# Altium PCB WorldClock.PcbDoc (part 4 of 13)
Units mil, origin at the board's own origin, x right, y up, seen from the top; angles counter-clockwise.
Board outline 3700 x 3850 mil, 2 copper layers (Top Layer, Bottom Layer); 227 components, 134 nets, 1324 pads, 248 vias.
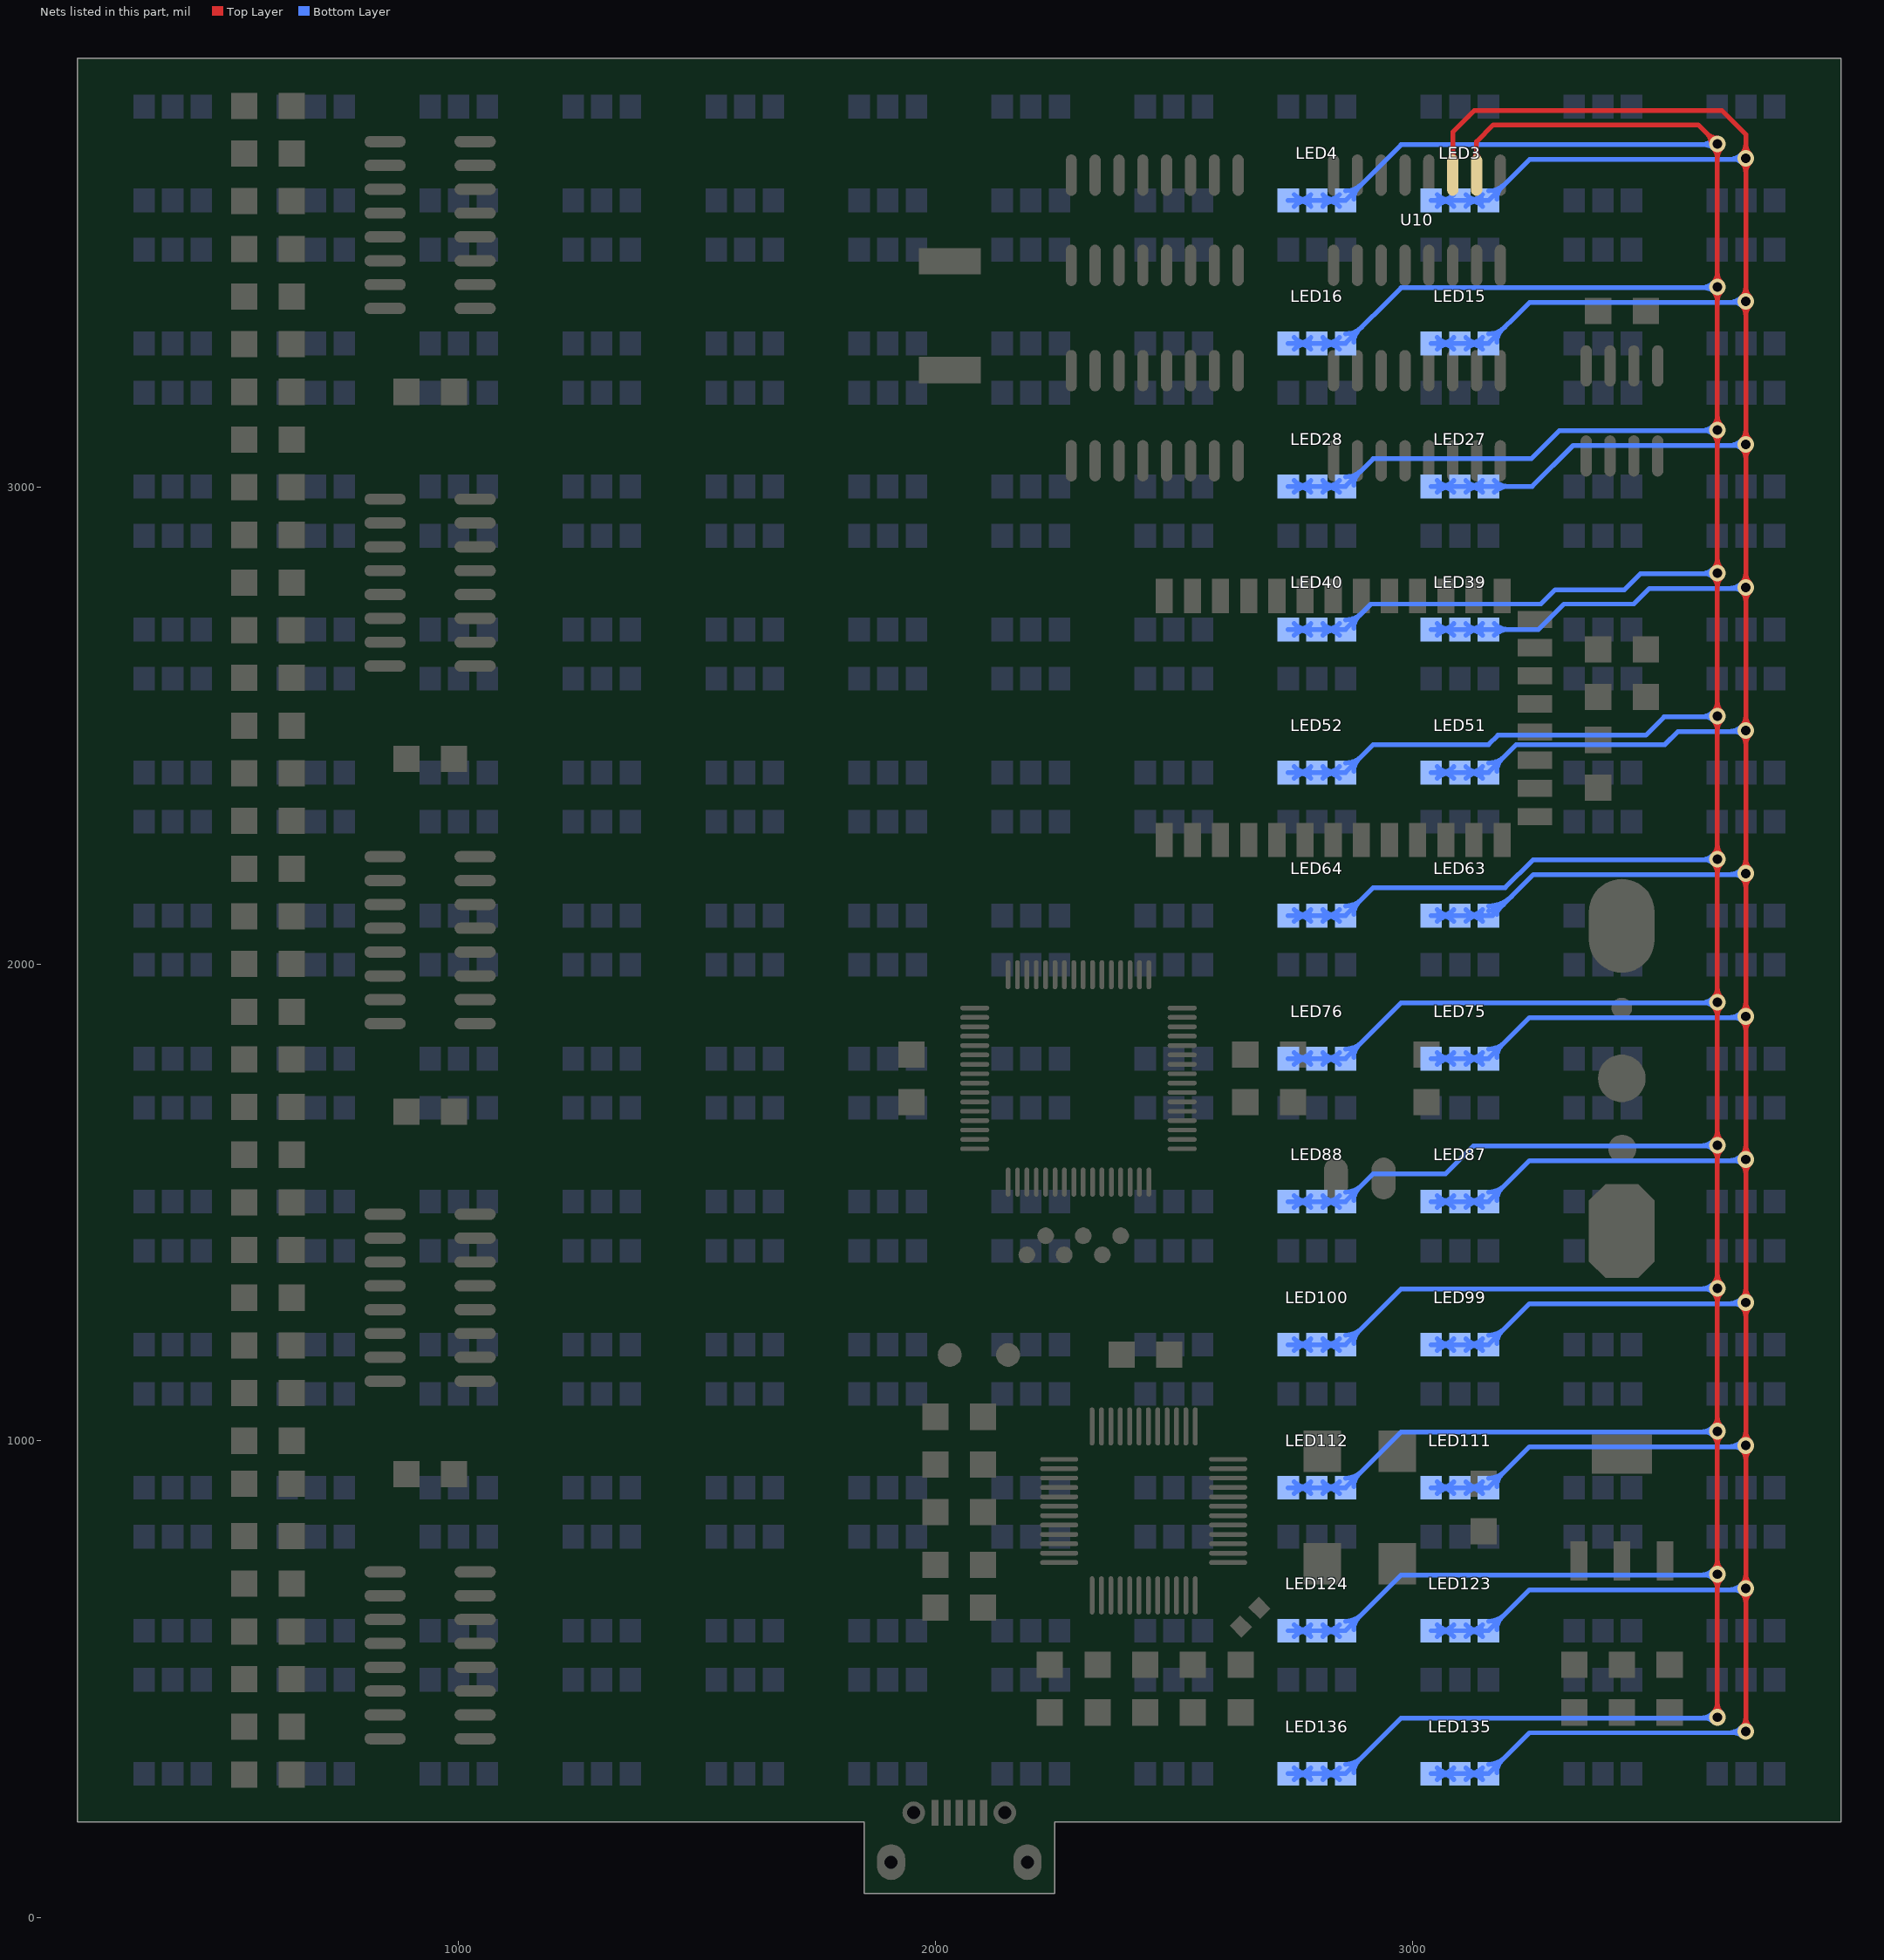
[diagram p4: the nets of this part, all layers, seen from the top]

## Via types
v1: diameter 35, hole 20, Top Layer to Bottom Layer, tented both sides, 213 vias
v2: diameter 24, hole 12, Top Layer to Bottom Layer, tented both sides, 35 vias

## Nets (pads, with @x,y where several pads share a name; then routed paths per layer and width w, separated by ;. In a path a pad name is that pad's centre, name@x,y a point inside that pad or via, vN(x,y) a via of type N, cw(c..) or ccw(c..) an arc to the next point about the centre after c; other vN are vias at no path point) (continued)
CH3: LED3.4 LED3.5 LED3.6 LED15.4 LED15.5 LED15.6 LED27.4 LED27.5 LED27.6 LED39.4 LED39.5 LED39.6 LED51.4 LED51.5 LED51.6 LED63.4 LED63.5 LED63.6 LED75.4 LED75.5 LED75.6 LED87.4 LED87.5 LED87.6 LED99.4 LED99.5 LED99.6 LED111.4 LED111.5 LED111.6 LED123.4 LED123.5 LED123.6 LED135.4 LED135.5 LED135.6 U10.11 | length 19480.7
  Top Layer w10: U10.11@3080.18,3690.8 ccw(c3068.56,3702.43) 3085,3702.43 ccw(c3101.44,3702.43) U10.11@3089.82,3690.8 ; U10.11@3085,3654.49 3085,3745 3130,3790 3650,3790 3700,3740 v1(3700,3690) v1(3700,3390) v1(3700,3090) v1(3700,2790) v1(3700,2490) v1(3700,2190) v1(3700,1890) v1(3700,1590) v1(3700,1290) v1(3700,990) v1(3700,690) v1(3700,390) ; v1@3691.16,398.84 ccw(c3669.82,420.18) 3700,420.18 ccw(c3730.18,420.18) v1@3708.84,398.84 ; v1@3691.16,681.16 cw(c3669.82,659.82) 3700,659.82 cw(c3730.18,659.82) v1@3708.84,681.16 ; v1@3691.16,698.84 ccw(c3669.82,720.18) 3700,720.18 ccw(c3730.18,720.18) v1@3708.84,698.84 ; v1@3691.16,981.16 cw(c3669.82,959.82) 3700,959.82 cw(c3730.18,959.82) v1@3708.84,981.16 ; v1@3691.16,998.84 ccw(c3669.82,1020.18) 3700,1020.18 ccw(c3730.18,1020.18) v1@3708.84,998.84 ; v1@3691.16,1281.16 cw(c3669.82,1259.82) 3700,1259.82 cw(c3730.18,1259.82) v1@3708.84,1281.16 ; v1@3691.16,1298.84 ccw(c3669.82,1320.18) 3700,1320.18 ccw(c3730.18,1320.18) v1@3708.84,1298.84 ; v1@3691.16,1581.16 cw(c3669.82,1559.82) 3700,1559.82 cw(c3730.18,1559.82) v1@3708.84,1581.16 ; v1@3691.16,1598.84 ccw(c3669.82,1620.18) 3700,1620.18 ccw(c3730.18,1620.18) v1@3708.84,1598.84 ; v1@3691.16,1881.16 cw(c3669.82,1859.82) 3700,1859.82 cw(c3730.18,1859.82) v1@3708.84,1881.16 ; v1@3691.16,1898.84 ccw(c3669.82,1920.18) 3700,1920.18 ccw(c3730.18,1920.18) v1@3708.84,1898.84 ; v1@3691.16,2181.16 cw(c3669.82,2159.82) 3700,2159.82 cw(c3730.18,2159.82) v1@3708.84,2181.16 ; v1@3691.16,2198.84 ccw(c3669.82,2220.18) 3700,2220.18 ccw(c3730.18,2220.18) v1@3708.84,2198.84 ; v1@3691.16,2481.16 cw(c3669.82,2459.82) 3700,2459.82 cw(c3730.18,2459.82) v1@3708.84,2481.16 ; v1@3691.16,2498.84 ccw(c3669.82,2520.18) 3700,2520.18 ccw(c3730.18,2520.18) v1@3708.84,2498.84 ; v1@3691.16,2781.16 cw(c3669.82,2759.82) 3700,2759.82 cw(c3730.18,2759.82) v1@3708.84,2781.16 ; v1@3691.16,2798.84 ccw(c3669.82,2820.18) 3700,2820.18 ccw(c3730.18,2820.18) v1@3708.84,2798.84 ; v1@3691.16,3081.16 cw(c3669.82,3059.82) 3700,3059.82 cw(c3730.18,3059.82) v1@3708.84,3081.16 ; v1@3691.16,3098.84 ccw(c3669.82,3120.18) 3700,3120.18 ccw(c3730.18,3120.18) v1@3708.84,3098.84 ; v1@3691.16,3381.16 cw(c3669.82,3359.82) 3700,3359.82 cw(c3730.18,3359.82) v1@3708.84,3381.16 ; v1@3691.16,3398.84 ccw(c3669.82,3420.18) 3700,3420.18 ccw(c3730.18,3420.18) v1@3708.84,3398.84 ; v1@3691.16,3681.16 cw(c3669.82,3659.82) 3700,3659.82 cw(c3730.18,3659.82) v1@3708.84,3681.16 ; v1@3691.16,3698.84 ccw(c3669.82,3720.18) 3700,3720.18 ccw(c3730.18,3720.18) v1@3708.84,3698.84
  Bottom Layer w10: LED135.6@3040,301.57 LED135.5@3100,301.57 LED135.4@3160,301.57 3245.93,387.5 3697.5,387.5 v1(3700,390) ; LED123.6@3040,601.57 LED123.5@3100,601.57 LED123.4@3160,601.57 3245.93,687.5 3697.5,687.5 v1(3700,690) ; LED111.6@3040,901.57 LED111.5@3100,901.57 LED111.4@3160,901.57 3245.93,987.5 3697.5,987.5 v1(3700,990) ; LED99.6@3040,1201.57 LED99.5@3100,1201.57 LED99.4@3160,1201.57 3245.93,1287.5 3697.5,1287.5 v1(3700,1290) ; LED87.6@3040,1501.57 LED87.5@3100,1501.57 LED87.4@3160,1501.57 3245.93,1587.5 3697.5,1587.5 v1(3700,1590) ; LED75.6@3040,1801.57 LED75.5@3100,1801.57 LED75.4@3160,1801.57 3245.93,1887.5 3697.5,1887.5 v1(3700,1890) ; LED63.6@3040,2101.57 LED63.5@3100,2101.57 LED63.4@3160,2101.57 3168.44,2101.57 3254.37,2187.5 3697.5,2187.5 v1(3700,2190) ; LED51.6@3040,2401.57 LED51.5@3100,2401.57 LED51.4@3160,2401.57 3218.43,2460 3530,2460 3557.5,2487.5 3697.5,2487.5 v1(3700,2490) ; LED39.6@3040,2701.57 LED39.5@3100,2701.57 LED39.4@3160,2701.57 3265,2701.57 3318.43,2755 3465,2755 3497.5,2787.5 3697.5,2787.5 v1(3700,2790) ; LED27.6@3040,3001.57 LED27.5@3100,3001.57 LED27.4@3160,3001.57 3251.57,3001.57 3337.5,3087.5 3697.5,3087.5 v1(3700,3090) ; LED15.6@3040,3301.57 LED15.5@3100,3301.57 LED15.4@3160,3301.57 3245.93,3387.5 3697.5,3387.5 v1(3700,3390) ; LED3.6@3040,3601.57 LED3.5@3100,3601.57 LED3.4@3160,3601.57 3245.93,3687.5 3697.5,3687.5 v1(3700,3690) ; LED135.6@3052.37,289.2 cw(c3082.25,259.33) 3082.25,301.57 cw(c3082.25,343.82) LED135.6@3052.37,313.95 ; LED123.6@3052.37,589.2 cw(c3082.25,559.33) 3082.25,601.57 cw(c3082.25,643.82) LED123.6@3052.37,613.95 ; LED111.6@3052.37,889.2 cw(c3082.25,859.33) 3082.25,901.57 cw(c3082.25,943.82) LED111.6@3052.37,913.95 ; LED99.6@3052.37,1189.2 cw(c3082.25,1159.33) 3082.25,1201.57 cw(c3082.25,1243.82) LED99.6@3052.37,1213.95 ; LED87.6@3052.37,1489.2 cw(c3082.25,1459.33) 3082.25,1501.57 cw(c3082.25,1543.82) LED87.6@3052.37,1513.95 ; LED75.6@3052.37,1789.2 cw(c3082.25,1759.33) 3082.25,1801.57 cw(c3082.25,1843.82) LED75.6@3052.37,1813.95 ; LED63.6@3052.37,2089.2 cw(c3082.25,2059.33) 3082.25,2101.57 cw(c3082.25,2143.82) LED63.6@3052.37,2113.95 ; LED51.6@3052.37,2389.2 cw(c3082.25,2359.33) 3082.25,2401.57 cw(c3082.25,2443.82) LED51.6@3052.37,2413.95 ; LED39.6@3052.37,2689.2 cw(c3082.25,2659.33) 3082.25,2701.57 cw(c3082.25,2743.82) LED39.6@3052.37,2713.95 ; LED27.6@3052.37,2989.2 cw(c3082.25,2959.33) 3082.25,3001.57 cw(c3082.25,3043.82) LED27.6@3052.37,3013.95 ; LED15.6@3052.37,3289.2 cw(c3082.25,3259.33) 3082.25,3301.57 cw(c3082.25,3343.82) LED15.6@3052.37,3313.95 ; LED3.6@3052.37,3589.2 cw(c3082.25,3559.33) 3082.25,3601.57 cw(c3082.25,3643.82) LED3.6@3052.37,3613.95 ; LED135.6@3055.16,295.32 cw(c3071.02,286.17) 3066.28,303.86 ; LED135.6@3055.16,307.82 ccw(c3071.02,316.98) 3066.28,299.29 ; LED123.6@3055.16,595.32 cw(c3071.02,586.17) 3066.28,603.86 ; LED123.6@3055.16,607.82 ccw(c3071.02,616.98) 3066.28,599.29 ; LED111.6@3055.16,895.32 cw(c3071.02,886.17) 3066.28,903.86 ; LED111.6@3055.16,907.82 ccw(c3071.02,916.98) 3066.28,899.29 ; LED99.6@3055.16,1195.32 cw(c3071.02,1186.17) 3066.28,1203.86 ; LED99.6@3055.16,1207.82 ccw(c3071.02,1216.98) 3066.28,1199.29 ; LED87.6@3055.16,1495.32 cw(c3071.02,1486.17) 3066.28,1503.86 ; LED87.6@3055.16,1507.82 ccw(c3071.02,1516.98) 3066.28,1499.29 ; LED75.6@3055.16,1795.32 cw(c3071.02,1786.17) 3066.28,1803.86 ; LED75.6@3055.16,1807.82 ccw(c3071.02,1816.98) 3066.28,1799.29 ; LED63.6@3055.16,2095.32 cw(c3071.02,2086.17) 3066.28,2103.86 ; LED63.6@3055.16,2107.82 ccw(c3071.02,2116.98) 3066.28,2099.29 ; LED51.6@3055.16,2395.32 cw(c3071.02,2386.17) 3066.28,2403.86 ; LED51.6@3055.16,2407.82 ccw(c3071.02,2416.98) 3066.28,2399.29 ; LED39.6@3055.16,2695.32 cw(c3071.02,2686.17) 3066.28,2703.86 ; LED39.6@3055.16,2707.82 ccw(c3071.02,2716.98) 3066.28,2699.29 ; LED27.6@3055.16,2995.32 cw(c3071.02,2986.17) 3066.28,3003.86 ; LED27.6@3055.16,3007.82 ccw(c3071.02,3016.98) 3066.28,2999.29 ; LED15.6@3055.16,3295.32 cw(c3071.02,3286.17) 3066.28,3303.86 ; LED15.6@3055.16,3307.82 ccw(c3071.02,3316.98) 3066.28,3299.29 ; LED3.6@3055.16,3595.32 cw(c3071.02,3586.17) 3066.28,3603.86 ; LED3.6@3055.16,3607.82 ccw(c3071.02,3616.98) 3066.28,3599.29 ; LED135.6@3056.56,293.41 cw(c3064.87,290.57) 3067.15,299.06 ; LED135.6@3056.56,309.74 ccw(c3064.87,312.58) 3067.15,304.09 ; LED123.6@3056.56,593.41 cw(c3064.87,590.57) 3067.15,599.06 ; LED123.6@3056.56,609.74 ccw(c3064.87,612.58) 3067.15,604.09 ; LED111.6@3056.56,893.41 cw(c3064.87,890.57) 3067.15,899.06 ; LED111.6@3056.56,909.74 ccw(c3064.87,912.58) 3067.15,904.09 ; LED99.6@3056.56,1193.41 cw(c3064.87,1190.57) 3067.15,1199.06 ; LED99.6@3056.56,1209.74 ccw(c3064.87,1212.58) 3067.15,1204.09 ; LED87.6@3056.56,1493.41 cw(c3064.87,1490.57) 3067.15,1499.06 ; LED87.6@3056.56,1509.74 ccw(c3064.87,1512.58) 3067.15,1504.09 ; LED75.6@3056.56,1793.41 cw(c3064.87,1790.57) 3067.15,1799.06 ; LED75.6@3056.56,1809.74 ccw(c3064.87,1812.58) 3067.15,1804.09 ; LED63.6@3056.56,2093.41 cw(c3064.87,2090.57) 3067.15,2099.06 ; LED63.6@3056.56,2109.74 ccw(c3064.87,2112.58) 3067.15,2104.09 ; LED51.6@3056.56,2393.41 cw(c3064.87,2390.57) 3067.15,2399.06 ; LED51.6@3056.56,2409.74 ccw(c3064.87,2412.58) 3067.15,2404.09 ; LED39.6@3056.56,2693.41 cw(c3064.87,2690.57) 3067.15,2699.06 ; LED39.6@3056.56,2709.74 ccw(c3064.87,2712.58) 3067.15,2704.09 ; LED27.6@3056.56,2993.41 cw(c3064.87,2990.57) 3067.15,2999.06 ; LED27.6@3056.56,3009.74 ccw(c3064.87,3012.58) 3067.15,3004.09 ; LED15.6@3056.56,3293.41 cw(c3064.87,3290.57) 3067.15,3299.06 ; LED15.6@3056.56,3309.74 ccw(c3064.87,3312.58) 3067.15,3304.09 ; LED3.6@3056.56,3593.41 cw(c3064.87,3590.57) 3067.15,3599.06 ; LED3.6@3056.56,3609.74 ccw(c3064.87,3612.58) 3067.15,3604.09 ; LED135.5@3087.63,289.2 ccw(c3057.75,259.33) 3057.75,301.57 ccw(c3057.75,343.82) LED135.5@3087.63,313.95 ; LED123.5@3087.63,589.2 ccw(c3057.75,559.33) 3057.75,601.57 ccw(c3057.75,643.82) LED123.5@3087.63,613.95 ; LED111.5@3087.63,889.2 ccw(c3057.75,859.33) 3057.75,901.57 ccw(c3057.75,943.82) LED111.5@3087.63,913.95 ; LED99.5@3087.63,1189.2 ccw(c3057.75,1159.33) 3057.75,1201.57 ccw(c3057.75,1243.82) LED99.5@3087.63,1213.95 ; LED87.5@3087.63,1489.2 ccw(c3057.75,1459.33) 3057.75,1501.57 ccw(c3057.75,1543.82) LED87.5@3087.63,1513.95 ; LED75.5@3087.63,1789.2 ccw(c3057.75,1759.33) 3057.75,1801.57 ccw(c3057.75,1843.82) LED75.5@3087.63,1813.95 ; LED63.5@3087.63,2089.2 ccw(c3057.75,2059.33) 3057.75,2101.57 ccw(c3057.75,2143.82) LED63.5@3087.63,2113.95 ; LED51.5@3087.63,2389.2 ccw(c3057.75,2359.33) 3057.75,2401.57 ccw(c3057.75,2443.82) LED51.5@3087.63,2413.95 ; LED39.5@3087.63,2689.2 ccw(c3057.75,2659.33) 3057.75,2701.57 ccw(c3057.75,2743.82) LED39.5@3087.63,2713.95 ; LED27.5@3087.63,2989.2 ccw(c3057.75,2959.33) 3057.75,3001.57 ccw(c3057.75,3043.82) LED27.5@3087.63,3013.95 ; LED15.5@3087.63,3289.2 ccw(c3057.75,3259.33) 3057.75,3301.57 ccw(c3057.75,3343.82) LED15.5@3087.63,3313.95 ; LED3.5@3087.63,3589.2 ccw(c3057.75,3559.33) 3057.75,3601.57 ccw(c3057.75,3643.82) LED3.5@3087.63,3613.95 ; LED135.5@3112.37,289.2 cw(c3142.25,259.33) 3142.25,301.57 cw(c3142.25,343.82) LED135.5@3112.37,313.95 ; LED123.5@3112.37,589.2 cw(c3142.25,559.33) 3142.25,601.57 cw(c3142.25,643.82) LED123.5@3112.37,613.95 ; LED111.5@3112.37,889.2 cw(c3142.25,859.33) 3142.25,901.57 cw(c3142.25,943.82) LED111.5@3112.37,913.95 ; LED99.5@3112.37,1189.2 cw(c3142.25,1159.33) 3142.25,1201.57 cw(c3142.25,1243.82) LED99.5@3112.37,1213.95 ; LED87.5@3112.37,1489.2 cw(c3142.25,1459.33) 3142.25,1501.57 cw(c3142.25,1543.82) LED87.5@3112.37,1513.95 ; LED75.5@3112.37,1789.2 cw(c3142.25,1759.33) 3142.25,1801.57 cw(c3142.25,1843.82) LED75.5@3112.37,1813.95 ; LED63.5@3112.37,2089.2 cw(c3142.25,2059.33) 3142.25,2101.57 cw(c3142.25,2143.82) LED63.5@3112.37,2113.95 ; LED51.5@3112.37,2389.2 cw(c3142.25,2359.33) 3142.25,2401.57 cw(c3142.25,2443.82) LED51.5@3112.37,2413.95 ; LED39.5@3112.37,2689.2 cw(c3142.25,2659.33) 3142.25,2701.57 cw(c3142.25,2743.82) LED39.5@3112.37,2713.95 ; LED27.5@3112.37,2989.2 cw(c3142.25,2959.33) 3142.25,3001.57 cw(c3142.25,3043.82) LED27.5@3112.37,3013.95 ; LED15.5@3112.37,3289.2 cw(c3142.25,3259.33) 3142.25,3301.57 cw(c3142.25,3343.82) LED15.5@3112.37,3313.95 ; LED3.5@3112.37,3589.2 cw(c3142.25,3559.33) 3142.25,3601.57 cw(c3142.25,3643.82) LED3.5@3112.37,3613.95 ; 3132.85,299.06 cw(c3135.13,290.57) LED135.4@3143.44,293.41 ; 3132.85,304.09 ccw(c3135.13,312.58) LED135.4@3143.44,309.74 ; 3132.85,599.06 cw(c3135.13,590.57) LED123.4@3143.44,593.41 ; 3132.85,604.09 ccw(c3135.13,612.58) LED123.4@3143.44,609.74 ; 3132.85,899.06 cw(c3135.13,890.57) LED111.4@3143.44,893.41 ; 3132.85,904.09 ccw(c3135.13,912.58) LED111.4@3143.44,909.74 ; 3132.85,1199.06 cw(c3135.13,1190.57) LED99.4@3143.44,1193.41 ; 3132.85,1204.09 ccw(c3135.13,1212.58) LED99.4@3143.44,1209.74 ; 3132.85,1499.06 cw(c3135.13,1490.57) LED87.4@3143.44,1493.41 ; 3132.85,1504.09 ccw(c3135.13,1512.58) LED87.4@3143.44,1509.74 ; 3132.85,1799.06 cw(c3135.13,1790.57) LED75.4@3143.44,1793.41 ; 3132.85,1804.09 ccw(c3135.13,1812.58) LED75.4@3143.44,1809.74 ; 3132.85,2099.06 cw(c3135.13,2090.57) LED63.4@3143.44,2093.41 ; 3132.85,2104.09 ccw(c3135.13,2112.58) LED63.4@3143.44,2109.74 ; 3132.85,2399.06 cw(c3135.13,2390.57) LED51.4@3143.44,2393.41 ; 3132.85,2404.09 ccw(c3135.13,2412.58) LED51.4@3143.44,2409.74 ; 3132.85,2699.06 cw(c3135.13,2690.57) LED39.4@3143.44,2693.41 ; 3132.85,2704.09 ccw(c3135.13,2712.58) LED39.4@3143.44,2709.74 ; 3132.85,2999.06 cw(c3135.13,2990.57) LED27.4@3143.44,2993.41 ; 3132.85,3004.09 ccw(c3135.13,3012.58) LED27.4@3143.44,3009.74 ; 3132.85,3299.06 cw(c3135.13,3290.57) LED15.4@3143.44,3293.41 ; 3132.85,3304.09 ccw(c3135.13,3312.58) LED15.4@3143.44,3309.74 ; 3132.85,3599.06 cw(c3135.13,3590.57) LED3.4@3143.44,3593.41 ; 3132.85,3604.09 ccw(c3135.13,3612.58) LED3.4@3143.44,3609.74 ; 3133.72,299.29 ccw(c3128.98,316.98) LED135.4@3144.84,307.82 ; 3133.72,303.86 cw(c3128.98,286.17) LED135.4@3144.84,295.32 ; 3133.72,599.29 ccw(c3128.98,616.98) LED123.4@3144.84,607.82 ; 3133.72,603.86 cw(c3128.98,586.17) LED123.4@3144.84,595.32 ; 3133.72,899.29 ccw(c3128.98,916.98) LED111.4@3144.84,907.82 ; 3133.72,903.86 cw(c3128.98,886.17) LED111.4@3144.84,895.32 ; 3133.72,1199.29 ccw(c3128.98,1216.98) LED99.4@3144.84,1207.82 ; 3133.72,1203.86 cw(c3128.98,1186.17) LED99.4@3144.84,1195.32 ; 3133.72,1499.29 ccw(c3128.98,1516.98) LED87.4@3144.84,1507.82 ; 3133.72,1503.86 cw(c3128.98,1486.17) LED87.4@3144.84,1495.32 ; 3133.72,1799.29 ccw(c3128.98,1816.98) LED75.4@3144.84,1807.82 ; 3133.72,1803.86 cw(c3128.98,1786.17) LED75.4@3144.84,1795.32 ; 3133.72,2099.29 ccw(c3128.98,2116.98) LED63.4@3144.84,2107.82 ; 3133.72,2103.86 cw(c3128.98,2086.17) LED63.4@3144.84,2095.32 ; 3133.72,2399.29 ccw(c3128.98,2416.98) LED51.4@3144.84,2407.82 ; 3133.72,2403.86 cw(c3128.98,2386.17) LED51.4@3144.84,2395.32 ; 3133.72,2699.29 ccw(c3128.98,2716.98) LED39.4@3144.84,2707.82 ; 3133.72,2703.86 cw(c3128.98,2686.17) LED39.4@3144.84,2695.32 ; 3133.72,2999.29 ccw(c3128.98,3016.98) LED27.4@3144.84,3007.82 ; 3133.72,3003.86 cw(c3128.98,2986.17) LED27.4@3144.84,2995.32 ; 3133.72,3299.29 ccw(c3128.98,3316.98) LED15.4@3144.84,3307.82 ; 3133.72,3303.86 cw(c3128.98,3286.17) LED15.4@3144.84,3295.32 ; 3133.72,3599.29 ccw(c3128.98,3616.98) LED3.4@3144.84,3607.82 ; 3133.72,3603.86 cw(c3128.98,3586.17) LED3.4@3144.84,3595.32 ; LED135.4@3147.63,289.2 ccw(c3117.75,259.33) 3117.75,301.57 ccw(c3117.75,343.82) LED135.4@3147.63,313.95 ; LED123.4@3147.63,589.2 ccw(c3117.75,559.33) 3117.75,601.57 ccw(c3117.75,643.82) LED123.4@3147.63,613.95 ; LED111.4@3147.63,889.2 ccw(c3117.75,859.33) 3117.75,901.57 ccw(c3117.75,943.82) LED111.4@3147.63,913.95 ; LED99.4@3147.63,1189.2 ccw(c3117.75,1159.33) 3117.75,1201.57 ccw(c3117.75,1243.82) LED99.4@3147.63,1213.95 ; LED87.4@3147.63,1489.2 ccw(c3117.75,1459.33) 3117.75,1501.57 ccw(c3117.75,1543.82) LED87.4@3147.63,1513.95 ; LED75.4@3147.63,1789.2 ccw(c3117.75,1759.33) 3117.75,1801.57 ccw(c3117.75,1843.82) LED75.4@3147.63,1813.95 ; LED63.4@3147.63,2089.2 ccw(c3117.75,2059.33) 3117.75,2101.57 ccw(c3117.75,2143.82) LED63.4@3147.63,2113.95 ; LED51.4@3147.63,2389.2 ccw(c3117.75,2359.33) 3117.75,2401.57 ccw(c3117.75,2443.82) LED51.4@3147.63,2413.95 ; LED39.4@3147.63,2689.2 ccw(c3117.75,2659.33) 3117.75,2701.57 ccw(c3117.75,2743.82) LED39.4@3147.63,2713.95 ; LED27.4@3147.63,2989.2 ccw(c3117.75,2959.33) 3117.75,3001.57 ccw(c3117.75,3043.82) LED27.4@3147.63,3013.95 ; LED15.4@3147.63,3289.2 ccw(c3117.75,3259.33) 3117.75,3301.57 ccw(c3117.75,3343.82) LED15.4@3147.63,3313.95 ; LED3.4@3147.63,3589.2 ccw(c3117.75,3559.33) 3117.75,3601.57 ccw(c3117.75,3643.82) LED3.4@3147.63,3613.95 ; LED135.4@3160,321.57 ccw(c3160,369.86) 3194.14,335.72 ; LED123.4@3160,621.57 ccw(c3160,669.86) 3194.14,635.72 ; LED111.4@3160,921.57 ccw(c3160,969.86) 3194.14,935.72 ; LED99.4@3160,1221.57 ccw(c3160,1269.86) 3194.14,1235.72 ; LED87.4@3160,1521.57 ccw(c3160,1569.86) 3194.14,1535.72 ; LED75.4@3160,1821.57 ccw(c3160,1869.86) 3194.14,1835.72 ; LED63.4@3160,2111.57 ccw(c3160,2156.1) 3191.48,2124.61 ; LED63.4@3160,2121.57 ccw(c3160,2190.24) 3208.55,2141.69 ; LED51.4@3160,2421.57 ccw(c3160,2469.86) 3194.14,2435.72 ; LED15.4@3160,3321.57 ccw(c3160,3369.86) 3194.14,3335.72 ; LED3.4@3160,3621.57 ccw(c3160,3669.86) 3194.14,3635.72 ; LED39.4@3172.37,2689.2 cw(c3202.25,2659.33) 3202.25,2701.57 cw(c3202.25,2743.82) LED39.4@3172.37,2713.95 ; LED27.4@3172.37,2989.2 cw(c3202.25,2959.33) 3202.25,3001.57 cw(c3202.25,3043.82) LED27.4@3172.37,3013.95 ; LED135.4@3177.5,304.07 cw(c3213.71,304.07) 3188.11,329.68 ; LED123.4@3177.5,604.07 cw(c3213.71,604.07) 3188.11,629.68 ; LED111.4@3177.5,904.07 cw(c3213.71,904.07) 3188.11,929.68 ; LED99.4@3177.5,1204.07 cw(c3213.71,1204.07) 3188.11,1229.68 ; LED87.4@3177.5,1504.07 cw(c3213.71,1504.07) 3188.11,1529.68 ; LED75.4@3177.5,1804.07 cw(c3213.71,1804.07) 3188.11,1829.68 ; LED63.4@3177.5,2104.07 cw(c3193.33,2104.07) LED63.4@3182.14,2115.27 ; LED51.4@3177.5,2404.07 cw(c3213.71,2404.07) 3188.11,2429.68 ; LED15.4@3177.5,3304.07 cw(c3213.71,3304.07) 3188.11,3329.68 ; LED3.4@3177.5,3604.07 cw(c3213.71,3604.07) 3188.11,3629.68 ; 3663.79,387.5 ccw(c3663.79,426.21) v1@3691.16,398.84 ; 3663.79,687.5 ccw(c3663.79,726.21) v1@3691.16,698.84 ; 3663.79,987.5 ccw(c3663.79,1026.21) v1@3691.16,998.84 ; 3663.79,1287.5 ccw(c3663.79,1326.21) v1@3691.16,1298.84 ; 3663.79,1587.5 ccw(c3663.79,1626.21) v1@3691.16,1598.84 ; 3663.79,1887.5 ccw(c3663.79,1926.21) v1@3691.16,1898.84 ; 3663.79,2187.5 ccw(c3663.79,2226.21) v1@3691.16,2198.84 ; 3663.79,2487.5 ccw(c3663.79,2526.21) v1@3691.16,2498.84 ; 3663.79,2787.5 ccw(c3663.79,2826.21) v1@3691.16,2798.84 ; 3663.79,3087.5 ccw(c3663.79,3126.21) v1@3691.16,3098.84 ; 3663.79,3387.5 ccw(c3663.79,3426.21) v1@3691.16,3398.84 ; 3663.79,3687.5 ccw(c3663.79,3726.21) v1@3691.16,3698.84 ; 3675.86,387.5 cw(c3675.86,365.86) v1@3691.16,381.16 ; 3675.86,687.5 cw(c3675.86,665.86) v1@3691.16,681.16 ; 3675.86,987.5 cw(c3675.86,965.86) v1@3691.16,981.16 ; 3675.86,1287.5 cw(c3675.86,1265.86) v1@3691.16,1281.16 ; 3675.86,1587.5 cw(c3675.86,1565.86) v1@3691.16,1581.16 ; 3675.86,1887.5 cw(c3675.86,1865.86) v1@3691.16,1881.16 ; 3675.86,2187.5 cw(c3675.86,2165.86) v1@3691.16,2181.16 ; 3675.86,2487.5 cw(c3675.86,2465.86) v1@3691.16,2481.16 ; 3675.86,2787.5 cw(c3675.86,2765.86) v1@3691.16,2781.16 ; 3675.86,3087.5 cw(c3675.86,3065.86) v1@3691.16,3081.16 ; 3675.86,3387.5 cw(c3675.86,3365.86) v1@3691.16,3381.16 ; 3675.86,3687.5 cw(c3675.86,3665.86) v1@3691.16,3681.16
CH4: LED4.4 LED4.5 LED4.6 LED16.4 LED16.5 LED16.6 LED28.4 LED28.5 LED28.6 LED40.4 LED40.5 LED40.6 LED52.4 LED52.5 LED52.6 LED64.4 LED64.5 LED64.6 LED76.4 LED76.5 LED76.6 LED88.4 LED88.5 LED88.6 LED100.4 LED100.5 LED100.6 LED112.4 LED112.5 LED112.6 LED124.4 LED124.5 LED124.6 LED136.4 LED136.5 LED136.6 U10.10 | length 22286.6
  Top Layer w10: U10.10@3130.18,3690.8 ccw(c3118.56,3702.43) 3135,3702.43 ccw(c3151.44,3702.43) U10.10@3139.82,3690.8 ; U10.10@3135,3654.49 3135,3725 3170,3760 3600,3760 v1(3640,3720) v1(3640,3420) v1(3640,3120) v1(3640,2820) v1(3640,2520) v1(3640,2220) v1(3640,1920) v1(3640,1620) v1(3640,1320) v1(3640,1020) v1(3640,720) v1(3640,420) ; v1@3627.5,3720 ccw(c3597.32,3720) 3618.66,3741.34 ccw(c3640,3762.68) v1@3640,3732.5 ; v1@3631.16,428.84 ccw(c3609.82,450.18) 3640,450.18 ccw(c3670.18,450.18) v1@3648.84,428.84 ; v1@3631.16,711.16 cw(c3609.82,689.82) 3640,689.82 cw(c3670.18,689.82) v1@3648.84,711.16 ; v1@3631.16,728.84 ccw(c3609.82,750.18) 3640,750.18 ccw(c3670.18,750.18) v1@3648.84,728.84 ; v1@3631.16,1011.16 cw(c3609.82,989.82) 3640,989.82 cw(c3670.18,989.82) v1@3648.84,1011.16 ; v1@3631.16,1028.84 ccw(c3609.82,1050.18) 3640,1050.18 ccw(c3670.18,1050.18) v1@3648.84,1028.84 ; v1@3631.16,1311.16 cw(c3609.82,1289.82) 3640,1289.82 cw(c3670.18,1289.82) v1@3648.84,1311.16 ; v1@3631.16,1328.84 ccw(c3609.82,1350.18) 3640,1350.18 ccw(c3670.18,1350.18) v1@3648.84,1328.84 ; v1@3631.16,1611.16 cw(c3609.82,1589.82) 3640,1589.82 cw(c3670.18,1589.82) v1@3648.84,1611.16 ; v1@3631.16,1628.84 ccw(c3609.82,1650.18) 3640,1650.18 ccw(c3670.18,1650.18) v1@3648.84,1628.84 ; v1@3631.16,1911.16 cw(c3609.82,1889.82) 3640,1889.82 cw(c3670.18,1889.82) v1@3648.84,1911.16 ; v1@3631.16,1928.84 ccw(c3609.82,1950.18) 3640,1950.18 ccw(c3670.18,1950.18) v1@3648.84,1928.84 ; v1@3631.16,2211.16 cw(c3609.82,2189.82) 3640,2189.82 cw(c3670.18,2189.82) v1@3648.84,2211.16 ; v1@3631.16,2228.84 ccw(c3609.82,2250.18) 3640,2250.18 ccw(c3670.18,2250.18) v1@3648.84,2228.84 ; v1@3631.16,2511.16 cw(c3609.82,2489.82) 3640,2489.82 cw(c3670.18,2489.82) v1@3648.84,2511.16 ; v1@3631.16,2528.84 ccw(c3609.82,2550.18) 3640,2550.18 ccw(c3670.18,2550.18) v1@3648.84,2528.84 ; v1@3631.16,2811.16 cw(c3609.82,2789.82) 3640,2789.82 cw(c3670.18,2789.82) v1@3648.84,2811.16 ; v1@3631.16,2828.84 ccw(c3609.82,2850.18) 3640,2850.18 ccw(c3670.18,2850.18) v1@3648.84,2828.84 ; v1@3631.16,3111.16 cw(c3609.82,3089.82) 3640,3089.82 cw(c3670.18,3089.82) v1@3648.84,3111.16 ; v1@3631.16,3128.84 ccw(c3609.82,3150.18) 3640,3150.18 ccw(c3670.18,3150.18) v1@3648.84,3128.84 ; v1@3631.16,3411.16 cw(c3609.82,3389.82) 3640,3389.82 cw(c3670.18,3389.82) v1@3648.84,3411.16 ; v1@3631.16,3428.84 ccw(c3609.82,3450.18) 3640,3450.18 ccw(c3670.18,3450.18) v1@3648.84,3428.84 ; v1@3631.16,3711.16 cw(c3609.82,3689.82) 3640,3689.82 cw(c3670.18,3689.82) v1@3648.84,3711.16
  Bottom Layer w10: LED136.6@2740,301.57 LED136.5@2800,301.57 LED136.4@2860,301.57 2976.85,418.43 3638.43,418.43 v1(3640,420) ; LED124.6@2740,601.57 LED124.5@2800,601.57 LED124.4@2860,601.57 2976.85,718.43 3638.43,718.43 v1(3640,720) ; LED112.6@2740,901.57 LED112.5@2800,901.57 LED112.4@2860,901.57 2976.85,1018.43 3638.43,1018.43 v1(3640,1020) ; LED100.6@2740,1201.57 LED100.5@2800,1201.57 LED100.4@2860,1201.57 2976.85,1318.43 3638.43,1318.43 v1(3640,1320) ; LED88.6@2740,1501.57 LED88.5@2800,1501.57 LED88.4@2860,1501.57 2918.43,1560 3070,1560 3128.43,1618.43 3638.43,1618.43 v1(3640,1620) ; LED76.6@2740,1801.57 LED76.5@2800,1801.57 LED76.4@2860,1801.57 2976.85,1918.43 3638.43,1918.43 v1(3640,1920) ; LED64.6@2740,2101.57 LED64.5@2800,2101.57 LED64.4@2860,2101.57 2918.43,2160 3195,2160 3253.43,2218.43 3638.43,2218.43 v1(3640,2220) ; LED52.6@2740,2401.57 LED52.5@2800,2401.57 LED52.4@2860,2401.57 2918.43,2460 3160,2460 3180,2480 3490,2480 3528.43,2518.43 3638.43,2518.43 v1(3640,2520) ; LED40.6@2740,2701.57 LED40.5@2800,2701.57 LED40.4@2860,2701.57 2913.43,2755 3270,2755 3300,2785 3445,2785 3478.43,2818.43 3638.43,2818.43 v1(3640,2820) ; LED28.6@2740,3001.57 LED28.5@2800,3001.57 LED28.4@2860,3001.57 2918.43,3060 3250,3060 3308.43,3118.43 3638.43,3118.43 v1(3640,3120) ; LED16.6@2740,3301.57 LED16.5@2800,3301.57 LED16.4@2860,3301.57 2976.85,3418.43 3638.43,3418.43 v1(3640,3420) ; LED4.6@2740,3601.57 LED4.5@2800,3601.57 LED4.4@2860,3601.57 2976.85,3718.43 3638.43,3718.43 v1(3640,3720) ; LED136.6@2752.37,289.2 cw(c2782.25,259.33) 2782.25,301.57 cw(c2782.25,343.82) LED136.6@2752.37,313.95 ; LED124.6@2752.37,589.2 cw(c2782.25,559.33) 2782.25,601.57 cw(c2782.25,643.82) LED124.6@2752.37,613.95 ; LED112.6@2752.37,889.2 cw(c2782.25,859.33) 2782.25,901.57 cw(c2782.25,943.82) LED112.6@2752.37,913.95 ; LED100.6@2752.37,1189.2 cw(c2782.25,1159.33) 2782.25,1201.57 cw(c2782.25,1243.82) LED100.6@2752.37,1213.95 ; LED88.6@2752.37,1489.2 cw(c2782.25,1459.33) 2782.25,1501.57 cw(c2782.25,1543.82) LED88.6@2752.37,1513.95 ; LED76.6@2752.37,1789.2 cw(c2782.25,1759.33) 2782.25,1801.57 cw(c2782.25,1843.82) LED76.6@2752.37,1813.95 ; LED64.6@2752.37,2089.2 cw(c2782.25,2059.33) 2782.25,2101.57 cw(c2782.25,2143.82) LED64.6@2752.37,2113.95 ; LED52.6@2752.37,2389.2 cw(c2782.25,2359.33) 2782.25,2401.57 cw(c2782.25,2443.82) LED52.6@2752.37,2413.95 ; LED40.6@2752.37,2689.2 cw(c2782.25,2659.33) 2782.25,2701.57 cw(c2782.25,2743.82) LED40.6@2752.37,2713.95 ; LED28.6@2752.37,2989.2 cw(c2782.25,2959.33) 2782.25,3001.57 cw(c2782.25,3043.82) LED28.6@2752.37,3013.95 ; LED16.6@2752.37,3289.2 cw(c2782.25,3259.33) 2782.25,3301.57 cw(c2782.25,3343.82) LED16.6@2752.37,3313.95 ; LED4.6@2752.37,3589.2 cw(c2782.25,3559.33) 2782.25,3601.57 cw(c2782.25,3643.82) LED4.6@2752.37,3613.95 ; 2772.85,299.06 cw(c2775.13,290.57) LED136.5@2783.44,293.41 ; 2772.85,304.09 ccw(c2775.13,312.58) LED136.5@2783.44,309.74 ; 2772.85,599.06 cw(c2775.13,590.57) LED124.5@2783.44,593.41 ; 2772.85,604.09 ccw(c2775.13,612.58) LED124.5@2783.44,609.74 ; 2772.85,899.06 cw(c2775.13,890.57) LED112.5@2783.44,893.41 ; 2772.85,904.09 ccw(c2775.13,912.58) LED112.5@2783.44,909.74 ; 2772.85,1199.06 cw(c2775.13,1190.57) LED100.5@2783.44,1193.41 ; 2772.85,1204.09 ccw(c2775.13,1212.58) LED100.5@2783.44,1209.74 ; 2772.85,1499.06 cw(c2775.13,1490.57) LED88.5@2783.44,1493.41 ; 2772.85,1504.09 ccw(c2775.13,1512.58) LED88.5@2783.44,1509.74 ; 2772.85,1799.06 cw(c2775.13,1790.57) LED76.5@2783.44,1793.41 ; 2772.85,1804.09 ccw(c2775.13,1812.58) LED76.5@2783.44,1809.74 ; 2772.85,2099.06 cw(c2775.13,2090.57) LED64.5@2783.44,2093.41 ; 2772.85,2104.09 ccw(c2775.13,2112.58) LED64.5@2783.44,2109.74 ; 2772.85,2399.06 cw(c2775.13,2390.57) LED52.5@2783.44,2393.41 ; 2772.85,2404.09 ccw(c2775.13,2412.58) LED52.5@2783.44,2409.74 ; 2772.85,2699.06 cw(c2775.13,2690.57) LED40.5@2783.44,2693.41 ; 2772.85,2704.09 ccw(c2775.13,2712.58) LED40.5@2783.44,2709.74 ; 2772.85,2999.06 cw(c2775.13,2990.57) LED28.5@2783.44,2993.41 ; 2772.85,3004.09 ccw(c2775.13,3012.58) LED28.5@2783.44,3009.74 ; 2772.85,3299.06 cw(c2775.13,3290.57) LED16.5@2783.44,3293.41 ; 2772.85,3304.09 ccw(c2775.13,3312.58) LED16.5@2783.44,3309.74 ; 2772.85,3599.06 cw(c2775.13,3590.57) LED4.5@2783.44,3593.41 ; 2772.85,3604.09 ccw(c2775.13,3612.58) LED4.5@2783.44,3609.74 ; 2773.72,299.29 ccw(c2768.98,316.98) LED136.5@2784.84,307.82 ; 2773.72,303.86 cw(c2768.98,286.17) LED136.5@2784.84,295.32 ; 2773.72,599.29 ccw(c2768.98,616.98) LED124.5@2784.84,607.82 ; 2773.72,603.86 cw(c2768.98,586.17) LED124.5@2784.84,595.32 ; 2773.72,899.29 ccw(c2768.98,916.98) LED112.5@2784.84,907.82 ; 2773.72,903.86 cw(c2768.98,886.17) LED112.5@2784.84,895.32 ; 2773.72,1199.29 ccw(c2768.98,1216.98) LED100.5@2784.84,1207.82 ; 2773.72,1203.86 cw(c2768.98,1186.17) LED100.5@2784.84,1195.32 ; 2773.72,1499.29 ccw(c2768.98,1516.98) LED88.5@2784.84,1507.82 ; 2773.72,1503.86 cw(c2768.98,1486.17) LED88.5@2784.84,1495.32 ; 2773.72,1799.29 ccw(c2768.98,1816.98) LED76.5@2784.84,1807.82 ; 2773.72,1803.86 cw(c2768.98,1786.17) LED76.5@2784.84,1795.32 ; 2773.72,2099.29 ccw(c2768.98,2116.98) LED64.5@2784.84,2107.82 ; 2773.72,2103.86 cw(c2768.98,2086.17) LED64.5@2784.84,2095.32 ; 2773.72,2399.29 ccw(c2768.98,2416.98) LED52.5@2784.84,2407.82 ; 2773.72,2403.86 cw(c2768.98,2386.17) LED52.5@2784.84,2395.32 ; 2773.72,2699.29 ccw(c2768.98,2716.98) LED40.5@2784.84,2707.82 ; 2773.72,2703.86 cw(c2768.98,2686.17) LED40.5@2784.84,2695.32 ; 2773.72,2999.29 ccw(c2768.98,3016.98) LED28.5@2784.84,3007.82 ; 2773.72,3003.86 cw(c2768.98,2986.17) LED28.5@2784.84,2995.32 ; 2773.72,3299.29 ccw(c2768.98,3316.98) LED16.5@2784.84,3307.82 ; 2773.72,3303.86 cw(c2768.98,3286.17) LED16.5@2784.84,3295.32 ; 2773.72,3599.29 ccw(c2768.98,3616.98) LED4.5@2784.84,3607.82 ; 2773.72,3603.86 cw(c2768.98,3586.17) LED4.5@2784.84,3595.32 ; LED136.5@2787.63,289.2 ccw(c2757.75,259.33) 2757.75,301.57 ccw(c2757.75,343.82) LED136.5@2787.63,313.95 ; LED124.5@2787.63,589.2 ccw(c2757.75,559.33) 2757.75,601.57 ccw(c2757.75,643.82) LED124.5@2787.63,613.95 ; LED112.5@2787.63,889.2 ccw(c2757.75,859.33) 2757.75,901.57 ccw(c2757.75,943.82) LED112.5@2787.63,913.95 ; LED100.5@2787.63,1189.2 ccw(c2757.75,1159.33) 2757.75,1201.57 ccw(c2757.75,1243.82) LED100.5@2787.63,1213.95 ; LED88.5@2787.63,1489.2 ccw(c2757.75,1459.33) 2757.75,1501.57 ccw(c2757.75,1543.82) LED88.5@2787.63,1513.95 ; LED76.5@2787.63,1789.2 ccw(c2757.75,1759.33) 2757.75,1801.57 ccw(c2757.75,1843.82) LED76.5@2787.63,1813.95 ; LED64.5@2787.63,2089.2 ccw(c2757.75,2059.33) 2757.75,2101.57 ccw(c2757.75,2143.82) LED64.5@2787.63,2113.95 ; LED52.5@2787.63,2389.2 ccw(c2757.75,2359.33) 2757.75,2401.57 ccw(c2757.75,2443.82) LED52.5@2787.63,2413.95 ; LED40.5@2787.63,2689.2 ccw(c2757.75,2659.33) 2757.75,2701.57 ccw(c2757.75,2743.82) LED40.5@2787.63,2713.95 ; LED28.5@2787.63,2989.2 ccw(c2757.75,2959.33) 2757.75,3001.57 ccw(c2757.75,3043.82) LED28.5@2787.63,3013.95 ; LED16.5@2787.63,3289.2 ccw(c2757.75,3259.33) 2757.75,3301.57 ccw(c2757.75,3343.82) LED16.5@2787.63,3313.95 ; LED4.5@2787.63,3589.2 ccw(c2757.75,3559.33) 2757.75,3601.57 ccw(c2757.75,3643.82) LED4.5@2787.63,3613.95 ; LED136.5@2812.37,289.2 cw(c2842.25,259.33) 2842.25,301.57 cw(c2842.25,343.82) LED136.5@2812.37,313.95 ; LED124.5@2812.37,589.2 cw(c2842.25,559.33) 2842.25,601.57 cw(c2842.25,643.82) LED124.5@2812.37,613.95 ; LED112.5@2812.37,889.2 cw(c2842.25,859.33) 2842.25,901.57 cw(c2842.25,943.82) LED112.5@2812.37,913.95 ; LED100.5@2812.37,1189.2 cw(c2842.25,1159.33) 2842.25,1201.57 cw(c2842.25,1243.82) LED100.5@2812.37,1213.95 ; LED88.5@2812.37,1489.2 cw(c2842.25,1459.33) 2842.25,1501.57 cw(c2842.25,1543.82) LED88.5@2812.37,1513.95 ; LED76.5@2812.37,1789.2 cw(c2842.25,1759.33) 2842.25,1801.57 cw(c2842.25,1843.82) LED76.5@2812.37,1813.95 ; LED64.5@2812.37,2089.2 cw(c2842.25,2059.33) 2842.25,2101.57 cw(c2842.25,2143.82) LED64.5@2812.37,2113.95 ; LED52.5@2812.37,2389.2 cw(c2842.25,2359.33) 2842.25,2401.57 cw(c2842.25,2443.82) LED52.5@2812.37,2413.95 ; LED40.5@2812.37,2689.2 cw(c2842.25,2659.33) 2842.25,2701.57 cw(c2842.25,2743.82) LED40.5@2812.37,2713.95 ; LED28.5@2812.37,2989.2 cw(c2842.25,2959.33) 2842.25,3001.57 cw(c2842.25,3043.82) LED28.5@2812.37,3013.95 ; LED16.5@2812.37,3289.2 cw(c2842.25,3259.33) 2842.25,3301.57 cw(c2842.25,3343.82) LED16.5@2812.37,3313.95 ; LED4.5@2812.37,3589.2 cw(c2842.25,3559.33) 2842.25,3601.57 cw(c2842.25,3643.82) LED4.5@2812.37,3613.95 ; LED136.5@2815.16,295.32 cw(c2831.02,286.17) 2826.28,303.86 ; LED136.5@2815.16,307.82 ccw(c2831.02,316.98) 2826.28,299.29 ; LED124.5@2815.16,595.32 cw(c2831.02,586.17) 2826.28,603.86 ; LED124.5@2815.16,607.82 ccw(c2831.02,616.98) 2826.28,599.29 ; LED112.5@2815.16,895.32 cw(c2831.02,886.17) 2826.28,903.86 ; LED112.5@2815.16,907.82 ccw(c2831.02,916.98) 2826.28,899.29 ; LED100.5@2815.16,1195.32 cw(c2831.02,1186.17) 2826.28,1203.86 ; LED100.5@2815.16,1207.82 ccw(c2831.02,1216.98) 2826.28,1199.29 ; LED88.5@2815.16,1495.32 cw(c2831.02,1486.17) 2826.28,1503.86 ; LED88.5@2815.16,1507.82 ccw(c2831.02,1516.98) 2826.28,1499.29 ; LED76.5@2815.16,1795.32 cw(c2831.02,1786.17) 2826.28,1803.86 ; LED76.5@2815.16,1807.82 ccw(c2831.02,1816.98) 2826.28,1799.29 ; LED64.5@2815.16,2095.32 cw(c2831.02,2086.17) 2826.28,2103.86 ; LED64.5@2815.16,2107.82 ccw(c2831.02,2116.98) 2826.28,2099.29 ; LED52.5@2815.16,2395.32 cw(c2831.02,2386.17) 2826.28,2403.86 ; LED52.5@2815.16,2407.82 ccw(c2831.02,2416.98) 2826.28,2399.29 ; LED40.5@2815.16,2695.32 cw(c2831.02,2686.17) 2826.28,2703.86 ; LED40.5@2815.16,2707.82 ccw(c2831.02,2716.98) 2826.28,2699.29 ; LED28.5@2815.16,2995.32 cw(c2831.02,2986.17) 2826.28,3003.86 ; LED28.5@2815.16,3007.82 ccw(c2831.02,3016.98) 2826.28,2999.29 ; LED16.5@2815.16,3295.32 cw(c2831.02,3286.17) 2826.28,3303.86 ; LED16.5@2815.16,3307.82 ccw(c2831.02,3316.98) 2826.28,3299.29 ; LED4.5@2815.16,3595.32 cw(c2831.02,3586.17) 2826.28,3603.86 ; LED4.5@2815.16,3607.82 ccw(c2831.02,3616.98) 2826.28,3599.29 ; LED136.5@2816.56,293.41 cw(c2824.87,290.57) 2827.15,299.06 ; LED136.5@2816.56,309.74 ccw(c2824.87,312.58) 2827.15,304.09 ; LED124.5@2816.56,593.41 cw(c2824.87,590.57) 2827.15,599.06 ; LED124.5@2816.56,609.74 ccw(c2824.87,612.58) 2827.15,604.09 ; LED112.5@2816.56,893.41 cw(c2824.87,890.57) 2827.15,899.06 ; LED112.5@2816.56,909.74 ccw(c2824.87,912.58) 2827.15,904.09 ; LED100.5@2816.56,1193.41 cw(c2824.87,1190.57) 2827.15,1199.06 ; LED100.5@2816.56,1209.74 ccw(c2824.87,1212.58) 2827.15,1204.09 ; LED88.5@2816.56,1493.41 cw(c2824.87,1490.57) 2827.15,1499.06 ; LED88.5@2816.56,1509.74 ccw(c2824.87,1512.58) 2827.15,1504.09 ; LED76.5@2816.56,1793.41 cw(c2824.87,1790.57) 2827.15,1799.06 ; LED76.5@2816.56,1809.74 ccw(c2824.87,1812.58) 2827.15,1804.09 ; LED64.5@2816.56,2093.41 cw(c2824.87,2090.57) 2827.15,2099.06 ; LED64.5@2816.56,2109.74 ccw(c2824.87,2112.58) 2827.15,2104.09 ; LED52.5@2816.56,2393.41 cw(c2824.87,2390.57) 2827.15,2399.06 ; LED52.5@2816.56,2409.74 ccw(c2824.87,2412.58) 2827.15,2404.09 ; LED40.5@2816.56,2693.41 cw(c2824.87,2690.57) 2827.15,2699.06 ; LED40.5@2816.56,2709.74 ccw(c2824.87,2712.58) 2827.15,2704.09 ; LED28.5@2816.56,2993.41 cw(c2824.87,2990.57) 2827.15,2999.06 ; LED28.5@2816.56,3009.74 ccw(c2824.87,3012.58) 2827.15,3004.09 ; LED16.5@2816.56,3293.41 cw(c2824.87,3290.57) 2827.15,3299.06 ; LED16.5@2816.56,3309.74 ccw(c2824.87,3312.58) 2827.15,3304.09 ; LED4.5@2816.56,3593.41 cw(c2824.87,3590.57) 2827.15,3599.06 ; LED4.5@2816.56,3609.74 ccw(c2824.87,3612.58) 2827.15,3604.09 ; LED136.4@2847.63,289.2 ccw(c2817.75,259.33) 2817.75,301.57 ccw(c2817.75,343.82) LED136.4@2847.63,313.95 ; LED124.4@2847.63,589.2 ccw(c2817.75,559.33) 2817.75,601.57 ccw(c2817.75,643.82) LED124.4@2847.63,613.95 ; LED112.4@2847.63,889.2 ccw(c2817.75,859.33) 2817.75,901.57 ccw(c2817.75,943.82) LED112.4@2847.63,913.95 ; LED100.4@2847.63,1189.2 ccw(c2817.75,1159.33) 2817.75,1201.57 ccw(c2817.75,1243.82) LED100.4@2847.63,1213.95 ; LED88.4@2847.63,1489.2 ccw(c2817.75,1459.33) 2817.75,1501.57 ccw(c2817.75,1543.82) LED88.4@2847.63,1513.95 ; LED76.4@2847.63,1789.2 ccw(c2817.75,1759.33) 2817.75,1801.57 ccw(c2817.75,1843.82) LED76.4@2847.63,1813.95 ; LED64.4@2847.63,2089.2 ccw(c2817.75,2059.33) 2817.75,2101.57 ccw(c2817.75,2143.82) LED64.4@2847.63,2113.95 ; LED52.4@2847.63,2389.2 ccw(c2817.75,2359.33) 2817.75,2401.57 ccw(c2817.75,2443.82) LED52.4@2847.63,2413.95 ; LED40.4@2847.63,2689.2 ccw(c2817.75,2659.33) 2817.75,2701.57 ccw(c2817.75,2743.82) LED40.4@2847.63,2713.95 ; LED28.4@2847.63,2989.2 ccw(c2817.75,2959.33) 2817.75,3001.57 ccw(c2817.75,3043.82) LED28.4@2847.63,3013.95 ; LED16.4@2847.63,3289.2 ccw(c2817.75,3259.33) 2817.75,3301.57 ccw(c2817.75,3343.82) LED16.4@2847.63,3313.95 ; LED4.4@2847.63,3589.2 ccw(c2817.75,3559.33) 2817.75,3601.57 ccw(c2817.75,3643.82) LED4.4@2847.63,3613.95 ; LED136.4@2860,321.57 ccw(c2860,369.86) 2894.14,335.72 ; LED124.4@2860,621.57 ccw(c2860,669.86) 2894.14,635.72 ; LED112.4@2860,921.57 ccw(c2860,969.86) 2894.14,935.72 ; LED100.4@2860,1221.57 ccw(c2860,1269.86) 2894.14,1235.72 ; LED88.4@2860,1521.57 ccw(c2860,1569.86) 2894.14,1535.72 ; LED76.4@2860,1821.57 ccw(c2860,1869.86) 2894.14,1835.72 ; LED64.4@2860,2121.57 ccw(c2860,2169.86) 2894.14,2135.72 ; LED52.4@2860,2421.57 ccw(c2860,2469.86) 2894.14,2435.72 ; LED40.4@2860,2721.57 ccw(c2860,2769.86) 2894.14,2735.72 ; LED28.4@2860,3021.57 ccw(c2860,3069.86) 2894.14,3035.72 ; LED16.4@2860,3321.57 ccw(c2860,3369.86) 2894.14,3335.72 ; LED4.4@2860,3621.57 ccw(c2860,3669.86) 2894.14,3635.72 ; LED136.4@2877.5,304.07 cw(c2913.71,304.07) 2888.11,329.68 ; LED124.4@2877.5,604.07 cw(c2913.71,604.07) 2888.11,629.68 ; LED112.4@2877.5,904.07 cw(c2913.71,904.07) 2888.11,929.68 ; LED100.4@2877.5,1204.07 cw(c2913.71,1204.07) 2888.11,1229.68 ; LED88.4@2877.5,1504.07 cw(c2913.71,1504.07) 2888.11,1529.68 ; LED76.4@2877.5,1804.07 cw(c2913.71,1804.07) 2888.11,1829.68 ; LED64.4@2877.5,2104.07 cw(c2913.71,2104.07) 2888.11,2129.68 ; LED52.4@2877.5,2404.07 cw(c2913.71,2404.07) 2888.11,2429.68 ; LED40.4@2877.5,2704.07 cw(c2913.71,2704.07) 2888.11,2729.68 ; LED28.4@2877.5,3004.07 cw(c2913.71,3004.07) 2888.11,3029.68 ; LED16.4@2877.5,3304.07 cw(c2913.71,3304.07) 2888.11,3329.68 ; LED4.4@2877.5,3604.07 cw(c2913.71,3604.07) 2888.11,3629.68 ; 3606.02,418.43 ccw(c3606.02,453.98) v1@3631.16,428.84 ; 3606.02,718.43 ccw(c3606.02,753.98) v1@3631.16,728.84 ; 3606.02,1018.43 ccw(c3606.02,1053.98) v1@3631.16,1028.84 ; 3606.02,1318.43 ccw(c3606.02,1353.98) v1@3631.16,1328.84 ; 3606.02,1618.43 ccw(c3606.02,1653.98) v1@3631.16,1628.84 ; 3606.02,1918.43 ccw(c3606.02,1953.98) v1@3631.16,1928.84 ; 3606.02,2218.43 ccw(c3606.02,2253.98) v1@3631.16,2228.84 ; 3606.02,2518.43 ccw(c3606.02,2553.98) v1@3631.16,2528.84 ; 3606.02,2818.43 ccw(c3606.02,2853.98) v1@3631.16,2828.84 ; 3606.02,3118.43 ccw(c3606.02,3153.98) v1@3631.16,3128.84 ; 3606.02,3418.43 ccw(c3606.02,3453.98) v1@3631.16,3428.84 ; 3606.02,3718.43 ccw(c3606.02,3753.98) v1@3631.16,3728.84 ; 3613.62,418.43 cw(c3613.62,393.62) v1@3631.16,411.16 ; 3613.62,718.43 cw(c3613.62,693.62) v1@3631.16,711.16 ; 3613.62,1018.43 cw(c3613.62,993.62) v1@3631.16,1011.16 ; 3613.62,1318.43 cw(c3613.62,1293.62) v1@3631.16,1311.16 ; 3613.62,1618.43 cw(c3613.62,1593.62) v1@3631.16,1611.16 ; 3613.62,1918.43 cw(c3613.62,1893.62) v1@3631.16,1911.16 ; 3613.62,2218.43 cw(c3613.62,2193.62) v1@3631.16,2211.16 ; 3613.62,2518.43 cw(c3613.62,2493.62) v1@3631.16,2511.16 ; 3613.62,2818.43 cw(c3613.62,2793.62) v1@3631.16,2811.16 ; 3613.62,3118.43 cw(c3613.62,3093.62) v1@3631.16,3111.16 ; 3613.62,3418.43 cw(c3613.62,3393.62) v1@3631.16,3411.16 ; 3613.62,3718.43 cw(c3613.62,3693.62) v1@3631.16,3711.16